# Altium PCB SwitchV2.PcbDoc
Units mil, origin at the board's own origin, x right, y up, seen from the top; angles counter-clockwise.
Board outline 2590 x 2255 mil, 2 copper layers (Top Layer, Bottom Layer); 54 components, 37 nets, 144 pads, 195 vias.
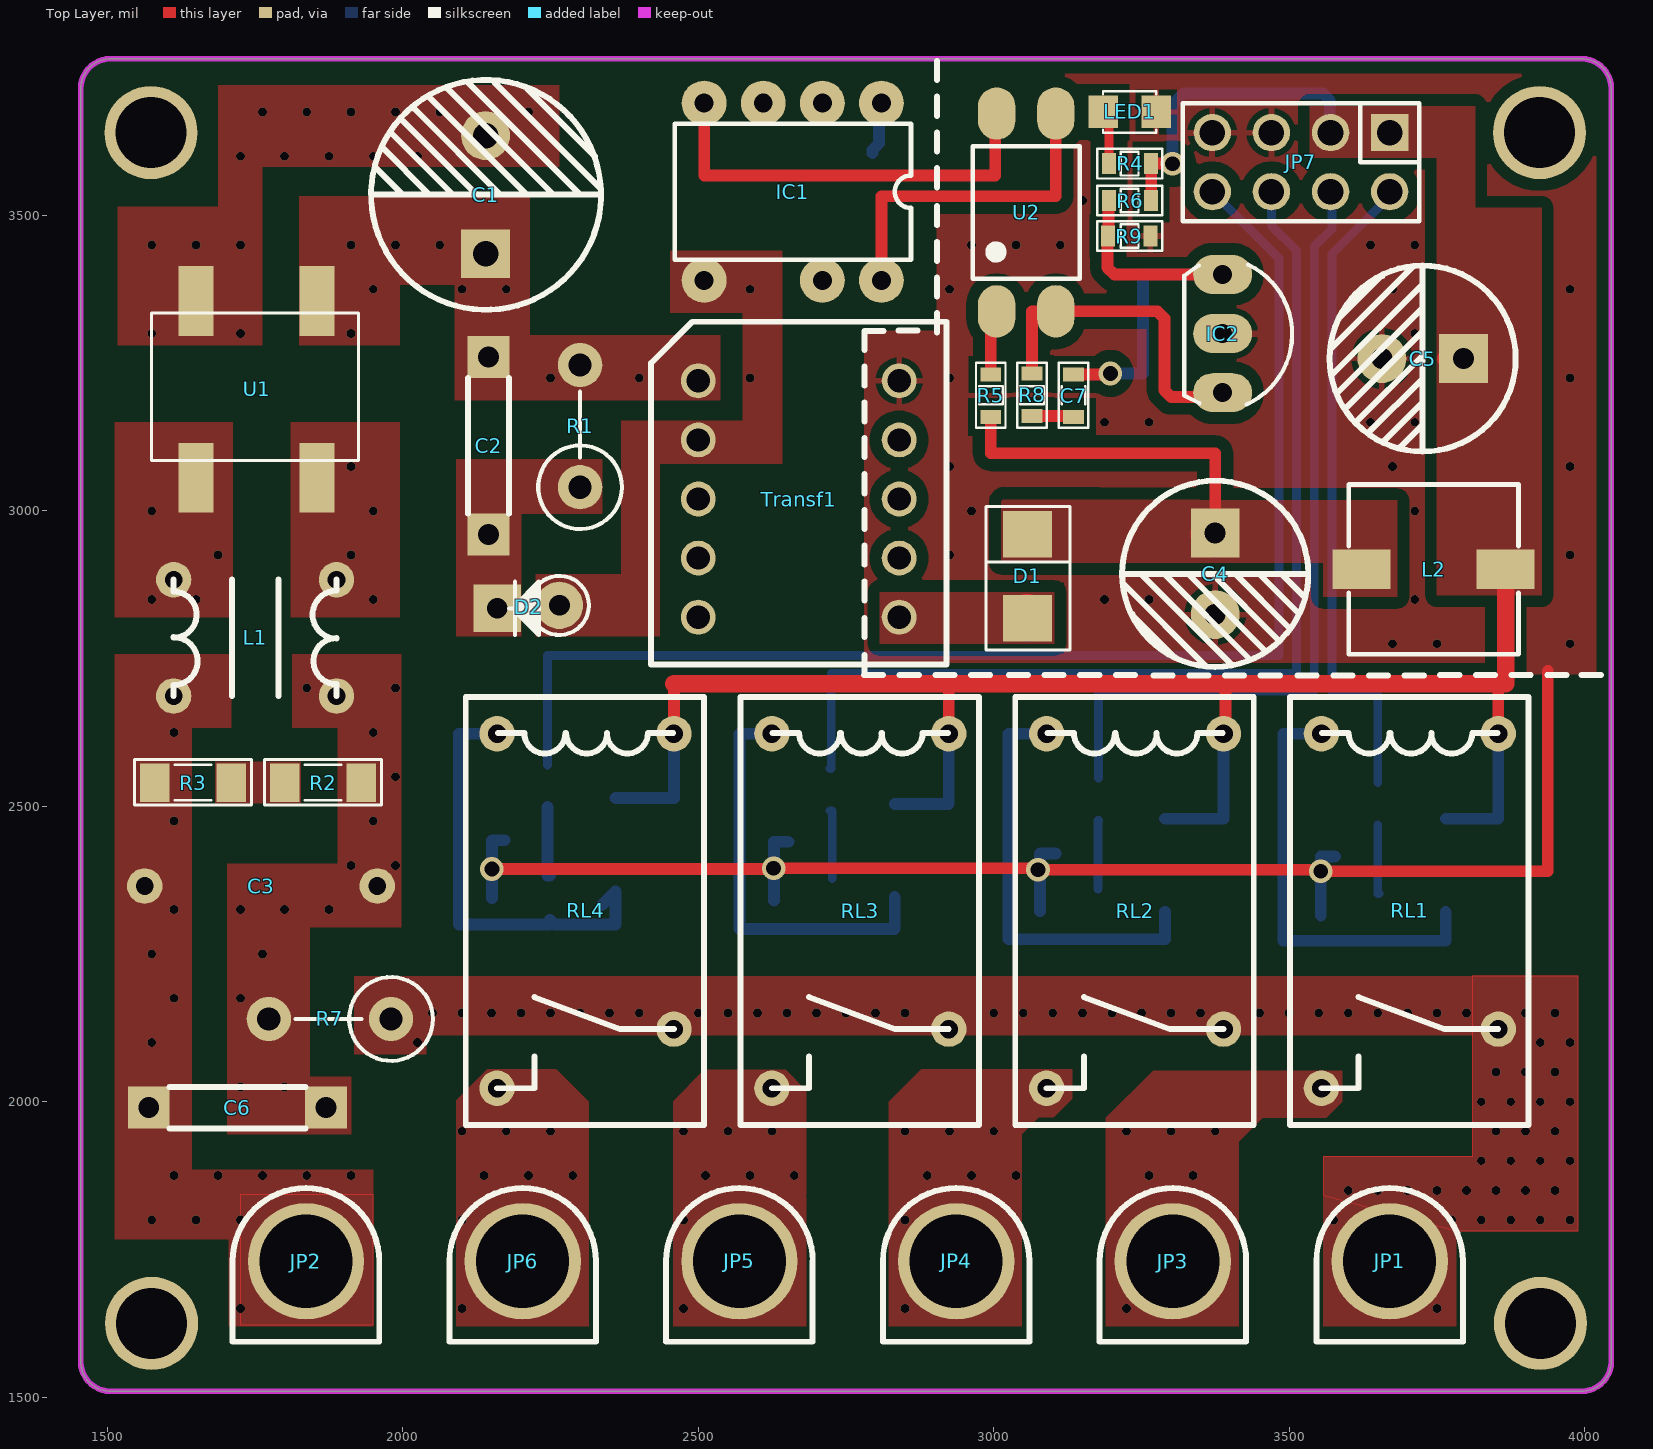
[diagram p0: Top Layer view]
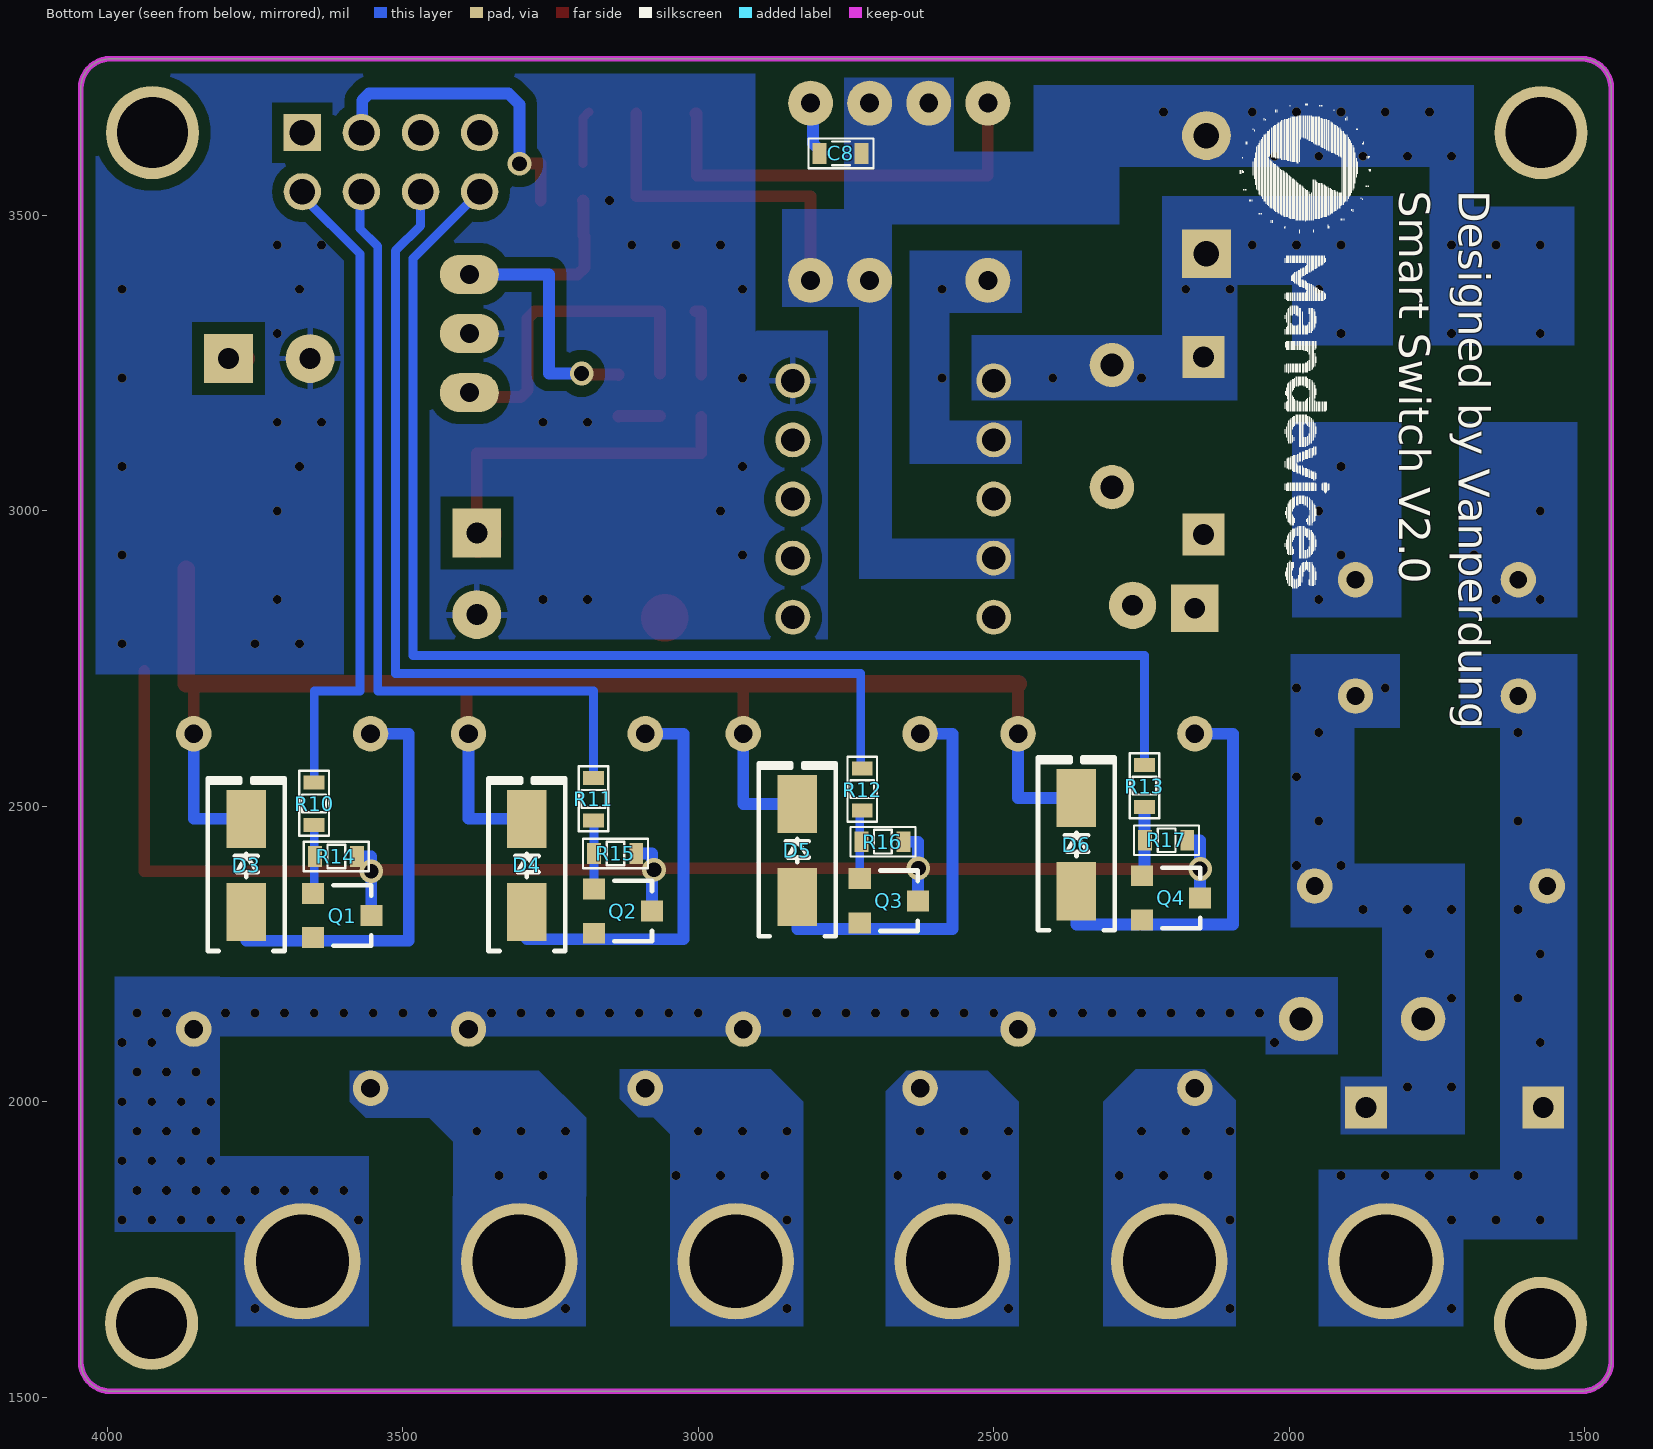
[diagram p1: Bottom Layer view, seen from below]
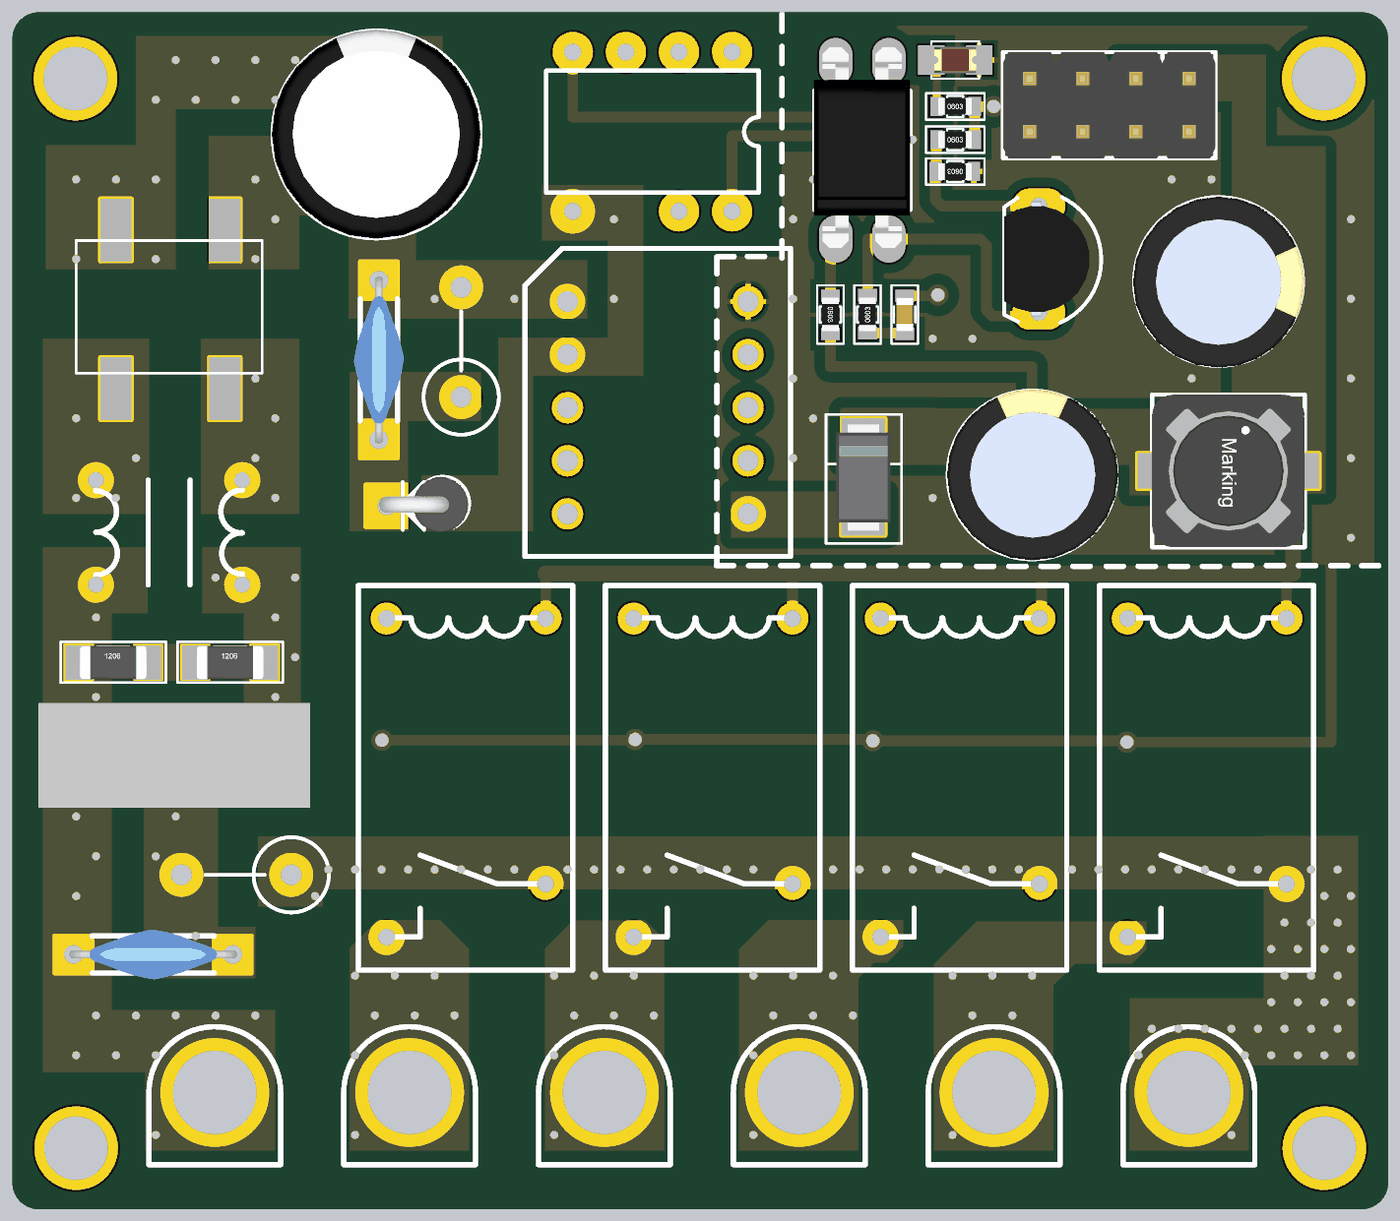
[diagram p2: 3D render of the assembled board from above, using the file's embedded part models]
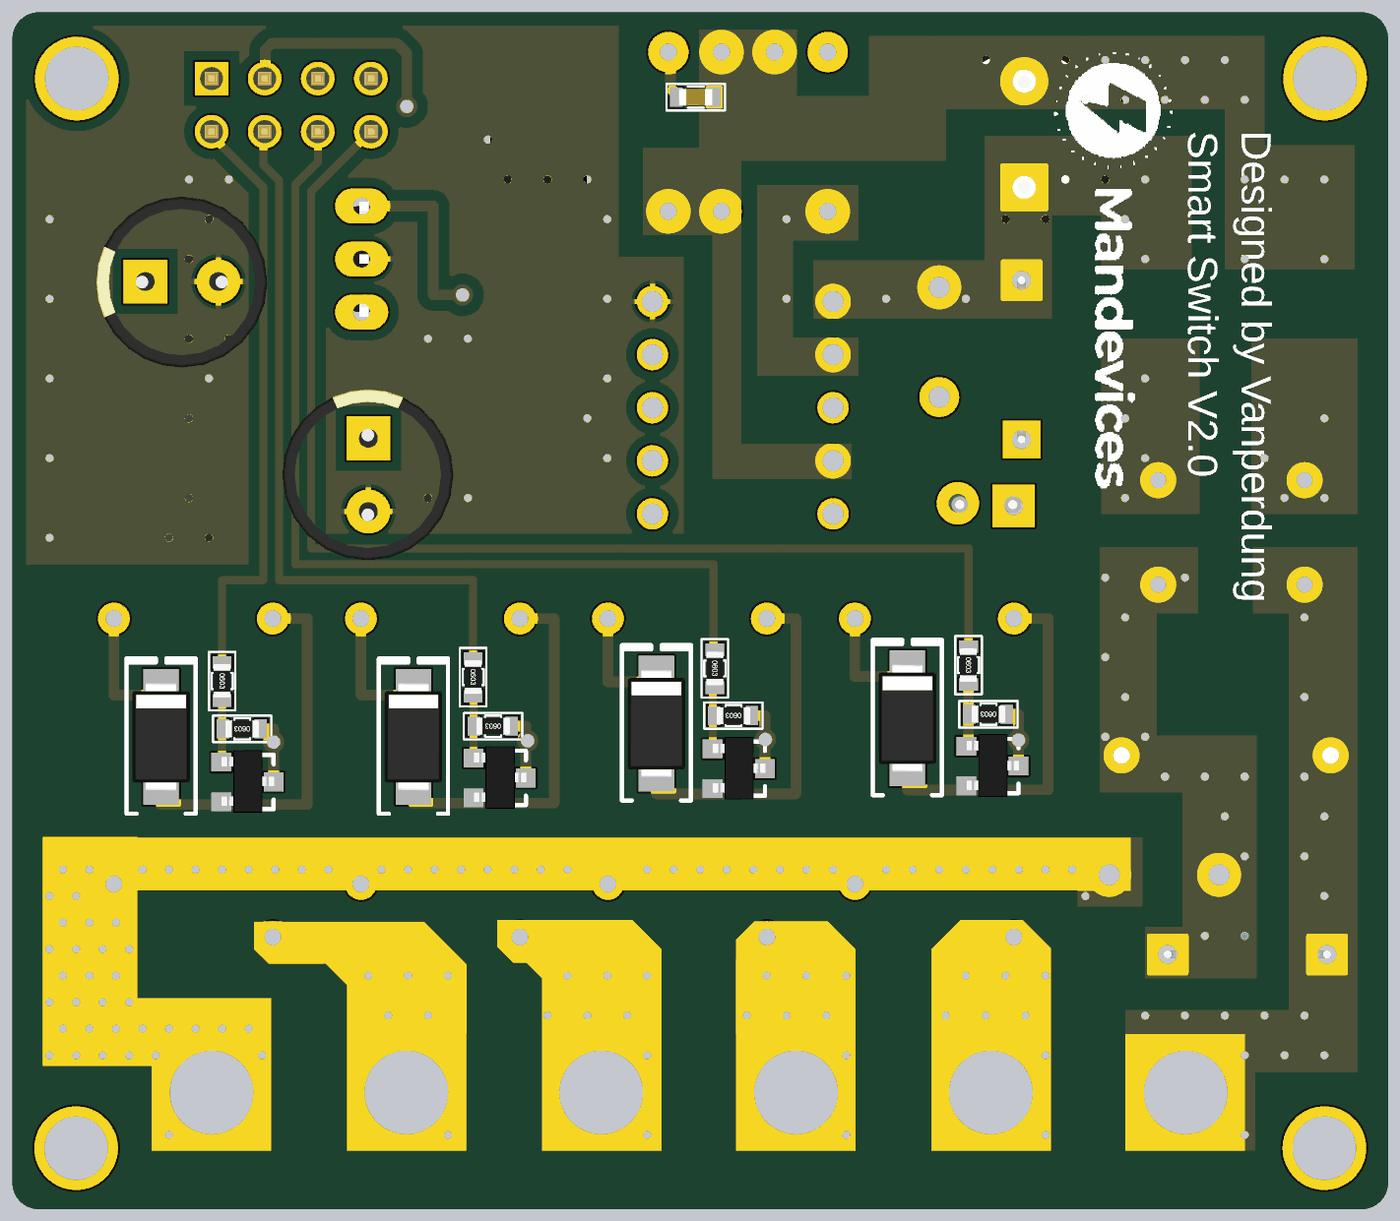
[diagram p3: 3D render of the assembled board from below, using the file's embedded part models]

## Layer stack, top to bottom
Top Solder: solder mask 0.4, Solder Resist, Dk 3.5
Top Layer: signal copper 1.4
Dielectric 1: dielectric 12.6, FR-4, Dk 4.8
Bottom Layer: signal copper 1.4
Bottom Solder: solder mask 0.4, Solder Resist, Dk 3.5

## Board outline
1455,1560 1455,3715 cw(c1505,3715) 1505,3765 3995,3765 cw(c3995,3715) 4045,3715 4045,1560 cw(c3995,1560) 3995,1510 1505,1510 cw(c1505,1560)

## Design rules (kind name [scope] priority, off if disabled: settings)
Clearance Clearance_1 [InNet('GND')] p1: gap=15 ignorepadtopadclearanceinfootprint=FALSE
Clearance [All] p2: gap=15 ignorepadtopadclearanceinfootprint=FALSE
Clearance Clearance_AC [InNetClass('AC')] p3: gap=20 ignorepadtopadclearanceinfootprint=FALSE
PolygonConnect PolygonConnect_AC [InNetClass('AC')] p1: connectstyle=Direct reliefconductorwidth=10 reliefentries=4 polygonreliefangle="90 Angle" airgapwidth=10
PolygonConnect [All] p2: thpad.connectstyle=Relief thpad.reliefconductorwidth=10 thpad.reliefentries=4 thpad.polygonreliefangle="90 Angle" thpad.airgapwidth=10 smdpad.connectstyle=Relief smdpad.reliefconductorwidth=10 smdpad.reliefentries=4 smdpad.polygonreliefangle="90 Angle" smdpad.airgapwidth=10 via.connectstyle=Direct via.reliefconductorwidth=10 via.reliefentries=4 via.polygonreliefangle="90 Angle" via.airgapwidth=10
RoutingVias [All] p1: holewidth=28 width=50 viastyle="Through Hole" minholewidth=10 minwidth=10 maxholewidth=50 maxwidth=50
SolderMaskExpansion [All] p1: expansion=4 istentingtop=FALSE
Width [All] p1: maxlimit=100 minlimit=10 preferedwidth=10
30 further rules are at their usual default settings.

## Classes and differential pairs
net class AC: L_1 L_2 L_3 L_4 L_AC N_AC

## Components (designator, comment, footprint, x,y, rotation, side; value= is the part's Value field where it differs from the comment)
C1 "10uF/400V" C10mm 2137.56,3535.35 r90 top
C2 "1nF/400V" 103/2KV 2145,3260 r270 top
C3 "0.1uF/275v" "Cap AC filter" 1760,2365 r0 top
C4 "680uF/16V" C8mm 3377.5,2900 r270 top
C5 "470uF/16V" C8mm 3732.5,3255 r180 top
C6 "14D471K" 103/2KV 1570,1990 r0 top
C7 "100nF" CAP_0603 3135,3197.5 r270 top value=33p
C8 "100nF" CAP_0603 2756.54,3605 r0 bottom value=33p
D1 "SS14" DO-214AC(SMA) 3060,2867.5 r270 top value=1N5007
D2 "1N4937" DIO-1AN 2210,2835 r0 top value=1N5007
D3 "M7" "DIODE SMA" 3765,2400 r90 bottom
D4 "M7" "DIODE SMA" 3290,2400 r90 bottom
D5 "M7" "DIODE SMA" 2832.5,2425 r90 bottom
D6 "M7" "DIODE SMA" 2360,2435 r90 bottom
IC1 "TNY264" TNY264 2876.54,3736.85 r180 top
IC2 "TL431" qto-92 3387.5,3300 r270 top
JP1 "Coc_dong" Coc_dong 3673.94,1731.65 r0 top
JP2 "Coc_dong" Coc_dong 1840,1731.65 r0 top
JP3 "Coc_dong" Coc_dong 3307.15,1731.65 r0 top
JP4 "Coc_dong" Coc_dong 2940.36,1731.65 r0 top
JP5 "Coc_dong" Coc_dong 2573.57,1731.65 r0 top
JP6 "Coc_dong" Coc_dong 2206.79,1731.65 r0 top
JP7 "JP 2x4 2.54" "JP 2x4 DT" 3520,3590 r180 top
L1 "Inductor EE8.3" "Inductor EE8.3" 1750,2785 r0 top
L2 "22uH" L_SMD 3732.5,2895 r90 top value="150 mH"
LED1 "LED" LED-0805-Red 3185,3675 r0 top value="LED 3 ly Single Colour"
Q1 "2N2222" SOT23 3602.5,2315 r270 bottom value=C9014
Q2 "2N2222" SOT23 3127.5,2322.5 r270 bottom value=C9014
Q3 "2N2222" SOT23 2677.5,2340 r270 bottom value=C9014
Q4 "2N2222" SOT23 2200,2345 r270 bottom value=C9014
R1 "200k/2W" RES-1WW 2300,3105 r90 top
R2 "1M" RES-SMD-1206 1865,2540 r0 top
R3 "1M" RES-SMD-1206 1645,2540 r0 top
R4 "1k" RES-SMD-0603 3230,3587.5 r0 top
R5 "200R" RES-SMD-0603 2995,3195.53 r270 top
R6 "10k" RES-SMD-0603 3230,3525 r0 top
R7 "2R/2W" RES-1WW 1915,2140 r180 top
R8 "3.3k" RES-SMD-0603 3065,3195.54 r90 top
R9 "27k" RES-SMD-0603 3230,3465 r180 top
R10 "1k" RES-SMD-0603 3650,2505 r270 bottom
R11 "1k" RES-SMD-0603 3177.5,2512.5 r270 bottom
R12 "1k" RES-SMD-0603 2722.5,2528.99 r270 bottom
R13 "1k" RES-SMD-0603 2245,2535 r270 bottom
R14 "10k" RES-SMD-0603 3612.5,2415 r0 bottom
R15 "10k" RES-SMD-0603 3140,2420 r0 bottom
R16 "10k" RES-SMD-0603 2687.5,2440 r0 bottom
R17 "10k" RES-SMD-0603 2207.5,2442.5 r0 bottom
RL1 "Relay_HF32" HF32F 3905,2685 r270 top
RL2 "Relay_HF32" HF32F 3440,2685 r270 top
RL3 "Relay_HF32" HF32F 2975,2685 r270 top
RL4 "Relay_HF32" HF32F 2510,2685 r270 top
Transf1 "Transformer EE12.7" "Transformer EE12.7" 2670,3020 r270 top
U1 "Diode Bridge Flate" DB207S 1755,3205 r0 top
U2 "OPTO PC817 SMD" SOP4 3055,3505 r90 top value=PC817

## Footprints (in the part's own frame and the unit in brackets; to place one, negate y for a bottom-side part, rotate by r counter-clockwise, add the part's x,y. Pads: shape width x height; smd on the part's side, far side on the other; paste and mask are expansions set on the pad)
103/2KV [mm]
  rect 1.8x1.8 hole 0.9: 1(0,0) 2(7.62,0)
  silkscreen extent 0.89,-0.89 6.73,0.89, body extent -0.19,-1.2 7.81,1.19, height 9.03
C8mm [mm]
  rect 2.1x2.1 hole 0.9: 1(-1.581,-0.069)
  round 2.1 hole 0.9: 2(1.919,-0.069)
  silkscreen extent -3.83,-4.07 4.17,3.93, body extent -3.93,-4.14 4.27,4.06, height 13.81
C10mm [mm]
  rect 2.1x2.1 hole 1.1: 1(-2.549,-0.062)
  round 2.1 hole 1.1: 2(2.531,-0.062)
  silkscreen extent -4.96,-5.02 4.92,4.85, body extent -5.01,-5.06 4.96,4.94, height 20.01
"Cap AC filter" [mil]
  round 60 hole 30: 1(-196.85,0) 2(196.85,0)
  body extent -256,-98 256,98, height 472
CAP_0603 [mm]
  rect 0.6x0.9 smd: 1(-0.839,0) 2(0.977,0)
  silkscreen extent -1.35,-0.64 1.45,0.64, body extent -0.75,-0.4 0.85,0.4, height 0.9
Coc_dong [mm]
  round 5 hole 4: 1(-0.1,-0.042)
  silkscreen extent -3.25,-3.5 3.05,3.11
DB207S [mm] "Bridge Rectifiers 2A 1000V"
  rect 1.5x3 smd: 1(2.54,3.81) 2(2.54,-3.785) 3(-2.667,-3.785) 4(-2.667,3.81)
  silkscreen extent -4.57,-3.05 4.32,3.3
DIO-1AN [mil] "Diode 1A, W 100mil, L 150mil"
  round 80 hole 35: 1(55,5)
  rect 80x80 hole 35: 2(-50,0)
  silkscreen extent -30,-45 105,55, body extent -64,-50 104,55, height 252
"DIODE SMA" [mm] "SMA"
  rect 2.5x1.7 smd: 1(-2,0) 2(2,0)
  silkscreen extent -3.68,-1.65 3.75,1.65, body extent -2.6,-1.37 2.6,1.37, height 2.4
DO-214AC(SMA) [mm] "DO-214AC Diode Smallest Size"
  rect 2x2.1 smd: 1(1.245,-0.076) 2(-2.367,-0.076)
  silkscreen extent -3.56,-1.86 2.62,1.76, body extent -3.13,-1.38 2.07,1.22, height 2.4
HF32F [mm]
  round 1.524 hole 0.8: 1(16.82,-8.9) 2(14.28,-1.3) 4(1.58,-8.9) 5(1.58,-1.3)
  silkscreen extent 0,-10.25 18.4,0
"Inductor EE8.3" [mil]
  round 60 hole 30: 1(-137.8,-98.43) 2(-137.8,98.43) 3(137.8,-98.43) 4(137.8,98.43)
  silkscreen extent -138,-98 138,98
"JP 2x4 DT" [mm]
  rect 1.61x1.6 hole 1.1: 1(-3.81,-1.27)
  oval 1.61x1.6 hole 1.1: 2(-1.27,-1.27) 3(1.27,-1.27) 4(3.81,-1.27) 5(3.81,1.27) 6(1.27,1.27) 7(-1.27,1.27) 8(-3.81,1.27)
  silkscreen extent -5.08,-2.54 5.08,2.54, body extent -5.08,-2.54 5.08,2.54, height 8.55
L_SMD [mm]
  rect 1.7x2.5 smd: 1(0.15,2.8) 2(0.15,-3.4)
  silkscreen extent -3.5,-3.95 3.8,3.35, body extent -3.5,-3.95 3.8,3.35, height 4.05
LED-0805-Red [mil]
  rect 50x55 smd: 1(0,0) 2(90,0)
  silkscreen extent 0,-35 90,35, body extent 5,-25 85,25, height 43
qto-92 [mil] "TO-92"
  oval 66x100 hole 32: 1(-100,0) 2(0,0) 3(100,0)
  silkscreen extent -117,-65 120,118, body extent -109,-66 109,95, height 245
RES-1WW [mm]
  round 1.905 hole 1: 1(-1.651,0) 2(3.6,0)
  silkscreen extent -3.45,-1.8 2.45,1.8
RES-SMD-0603 [mm]
  rect 0.6x0.9 smd: 1(-0.889,0) 2(0.927,0)
  silkscreen extent -1.4,-0.64 1.4,0.64, body extent -0.8,-0.4 0.8,0.4, height 0.43
RES-SMD-1206 [mil]
  rect 50x65 smd: 1(-65,0) 2(65,0)
  silkscreen extent -99,-38 99,39, body extent -63,-31 63,32, height 40
SOP4 [mm]
  oval 2.25x1.6 smd: 1(-4.25,1.27) 2(-4.25,-1.27) 3(4.25,-1.27) 4(4.25,1.27)
  silkscreen extent -2.85,-2.3 2.85,2.3, body extent -4.67,-2.29 4.93,2.31, height 3.6
SOT23 [mm] "SOT23"
  rect 0.9x0.95 smd: 1(-0.95,-1.25) 2(0,1.25)
  rect 0.9x0.95 smd mask+0: 3(0.95,-1.25)
  silkscreen extent -1.3,-0.38 1.3,1.25, body extent -1.52,-1.23 1.48,1.27, height 1.06
TNY264 [mil] "Opto"
  round 76 hole 32: 1(66.54,46.85) 2(166.54,46.85) 3(266.54,46.85) 4(366.54,46.85) 5(366.54,346.85) 7(166.54,346.85) 8(66.54,346.85)
  silkscreen extent 17,82 417,312
"Transformer EE12.7" [mm]
  round 1.5 hole 1: 1(-5.08,-4.318) 2(-2.54,-4.318) 3(0,-4.318) 4(2.54,-4.318) 5(5.08,-4.318) 6(5.08,4.318) 7(2.54,4.318) 8(0,4.318) 9(-2.54,4.318) 10(-5.08,4.318)
  silkscreen extent -7.62,-6.35 7.11,6.35

## Part data
C1 C4 C5: library part "Cap Pol", "Polarized Capacitor (Axial)", LatestRevisionDate=17-Jul-2002, LatestRevisionNote="Re-released for DXP Platform.", PackageReference=POLAR0.8, Published=8-Jun-2000, Publisher="Altium Limited"
C2: library part Cap2KV, "CAP CERAMIC", LatestRevisionDate=17-Jul-2002, LatestRevisionNote="Re-released for DXP Platform.", PackageReference=RAD-0.3, Published=8-Jun-2000, Publisher="Altium Limited"
C3: library part "Cap AC filter", "Tụ lọc nguồn AC 0.1uf 275v 10mm"
C6: library part Cap2KV, "Capacitor Ceramic 2KV", LatestRevisionDate=17-Jul-2002, LatestRevisionNote="Re-released for DXP Platform.", PackageReference=RAD-0.3, Published=8-Jun-2000, Publisher="Altium Limited"
C7 C8: library part CapSMD, "Capacitor", LatestRevisionDate=17-Jul-2002, LatestRevisionNote="Re-released for DXP Platform.", PackageReference=RAD-0.3, Published=8-Jun-2000, Publisher="Altium Limited"
D1: library part "Diode SMD", "Diode Schottky / 1N5819", Code - JEDEC=DO-214-AB, Published=8-Jun-2000, Publisher="Altium Limited", Revision="July-2002: Re-released for DXP Platform."
D2: library part "Diode SMD", "Diode Schottky / 1N4937", Code - JEDEC=DO-214-AB, Published=8-Jun-2000, Publisher="Altium Limited", Revision="July-2002: Re-released for DXP Platform."
D3 D4 D5 D6: library part "Diode M7 ( 4007 )", "Dán", Chung_Loai=Dán, Don_Vi=Con, Ma_Hang=MH000944, Ten_Linh_Kien="Diode M7 1N4007 SMD 1A 1000V"
IC1: "IC Power"
IC2: "Programmable Shunt Regulator"
JP7: library part "JP 2x4 2.54 Duc Thang", "Cắm", Chung_Loai=Cắm, Don_Vi=Con, Ma_Hang=MH002686, Ten_Linh_Kien="Jump Đôi Đực 2.54MM 2x40P Thẳng 11MM"
L2: library part Inductor, "CD73R 22uH 1.23A 7345"
LED1: "LED Single colour Green and Red"
Q1 Q2 Q3 Q4: library part "C1815 HF SMD", "NPN transistor"
R1 R2 R3 R4 R5 R6 R7 R8 R9 R10 R11 R12 R13 R14 R15 R16 R17: library part "Resistor - SMD", "Resistor", Manufacturer="Generic Components", Class=Passive, Published=08/06/2000, Publisher="Altium Hobart Technology Centre"
Transf1: library part "Tranformer EE16"
U1: "Diode Bridge"
U2: "Single Opto"

## Free pads (board coordinates)
  round 157.48 hole 120: 0(1573.75,3640) 0(1575,1625) 0(3923.75,3640) 0(3925,1625)

## Via types
v1: diameter 15, hole 15, Top Layer to Bottom Layer, tented both sides, 189 vias
v2: diameter 40, hole 25, Top Layer to Bottom Layer, tented both sides, 6 vias

## Nets (pads, with @x,y where several pads share a name; then routed paths per layer and width w, separated by ;. In a path a pad name is that pad's centre, name@x,y a point inside that pad or via, vN(x,y) a via of type N, cw(c..) or ccw(c..) an arc to the next point about the centre after c; other vN are vias at no path point)
+12: C5.1 D3.2 D4.2 D5.2 D6.2 JP7.1 JP7.2 L2.2 R4.2 R6.2 RL1.5 RL2.5 RL3.5 RL4.5 | length 3399.6
  Top Layer w20: RL4.5 2458.82,2707.5 ; 2922.5,2707.5 2923.82,2707.5 RL3.5 ; R6.2 R4.2 v2(3302.5,3587.5) ; RL2.5 3392.5,2622.8 3392.5,2707.5 ; RL1.5 3853.82,2707.5
  Top Layer w30: 2458.82,2707.5 2922.5,2707.5 ; 2923.82,2707.5 3392.5,2707.5 3866.36,2707.5 L2.2 ; C5.1@3765,3257.7 C5.1
  Bottom Layer w20: D6.2 2458.82,2513.74 RL4.5 ; D5.2 2923.82,2503.74 RL3.5 ; D4.2 3388.82,2478.74 RL2.5 ; v2(3302.5,3587.5) 3302.5,3687.5 3321.25,3706.25 3557.03,3706.25 3568.75,3694.53 3568.75,3641.25 JP7.2 ; D3.2 3853.82,2478.74 RL1.5
GND: C4.2 C5.2 IC2.2 JP7.3 JP7.4 LED1.2 Q1.2 Q2.2 Q3.2 Q4.2 R9.1 R14.1 R15.1 R16.1 R17.1 Transf1.10 | length 2620.3
  Top Layer w20: v2(2150.79,2393.75) 2627.5,2393.75 v2(2627.5,2395) 3075,2395 v2(3075,2392.5) v2@3552.5,2392.5 ; v2(3553.29,2390) 3937.5,2390 3937.5,2728.75
  Bottom Layer w20: Q4.2 v2(2150.79,2393.75) 2150.79,2442.5 R17.1 ; Q3.2 2628.29,2440 R16.1 ; Q2.2 3078.29,2420 R15.1 ; Q1.2 v2(3553.29,2390) 3553.29,2415 R14.1
  other v1: 3675,2775 3750,2775 3975,2775 3187.5,2850 3262.5,2850 3712.5,2850 2925,2925 3975,2925 2962.5,3000 3712.5,3000 2925,3075 3675,3075 3975,3075 3187.5,3150 3262.5,3150 3637.5,3150 3712.5,3150 2925,3225 3975,3225 3712.5,3300 2925,3375 3675,3375 3975,3375 2962.5,3450 3037.5,3450 3112.5,3450 3637.5,3450 3712.5,3450 3150,3525
GND_AC: C1.2 C8.1 IC1.2 IC1.3 IC1.7 IC1.8 Transf1.4 U1.4 U2.3 | length 577.3
  Top Layer w20: IC1.8 2810,3532.5 3105,3532.5 U2.3
  other v1: 1575,3300 1725,3300 1575,3450 1650,3450 1725,3450 1725,3600 1800,3600 1875,3600 1950,3600 2025,3600 1762.5,3675 1837.5,3675 1912.5,3675 1987.5,3675 2062.5,3675 2212.5,3675
L_1: JP3.1 RL1.1
  other v1: 3225,1650 3262.5,1875 3337.5,1875 3225,1950 3300,1950 3375,1950
L_2: JP4.1 RL2.1
  other v1: 2850,1650 2850,1800 2887.5,1875 2962.5,1875 3037.5,1875 2850,1950 2925,1950 3000,1950
L_3: JP5.1 RL3.1
  other v1: 2475,1650 2475,1800 2512.5,1875 2587.5,1875 2662.5,1875 2475,1950 2550,1950 2625,1950
L_4: JP6.1 RL4.1
  other v1: 2100,1650 2100,1800 2137.5,1875 2212.5,1875 2287.5,1875 2100,1950 2175,1950 2250,1950
L_AC: JP1.1 R7.1 RL1.2 RL2.2 RL3.2 RL4.2
  other v1: 3750,1650 3575,1800 3775,1800 3825,1800 3875,1800 3925,1800 3975,1800 3600,1850 3650,1850 3700,1850 3750,1850 3800,1850 3850,1850 3900,1850 3950,1850 3825,1900 3875,1900 3925,1900 3975,1900 3850,1950 3900,1950 3950,1950 3825,2000 3875,2000 3925,2000 3975,2000 3850,2050 3900,2050 3950,2050 2025,2100 3925,2100 3975,2100 2050,2150 2100,2150 2150,2150 2200,2150 2250,2150 2300,2150 2350,2150 2400,2150 2500,2150 2550,2150 2600,2150 2650,2150 2700,2150 2750,2150 2800,2150 2850,2150 3000,2150 3050,2150 3100,2150 3150,2150 3200,2150 3250,2150 3300,2150 3350,2150 3450,2150 3500,2150 3550,2150 3600,2150 3650,2150 3700,2150 3750,2150 3800,2150 3900,2150 3950,2150
N_AC: C3.1 C6.1 JP2.1 L1.1 R3.1
  other v1: 1725,1650 1575,1800 1650,1800 1725,1800 1612.5,1875 1687.5,1875 1762.5,1875 1837.5,1875 1912.5,1875 1575,2100 1612.5,2175 1575,2250 1612.5,2325 1612.5,2475 1612.5,2625
NetC1_1: C1.1 C2.1 R1.2 Transf1.1 U1.1
  other v1: 2250,3225 2400,3225 1912.5,3300 1950,3375 2100,3375 2175,3375 1912.5,3450 1987.5,3450 2062.5,3450
NetC2_2: C2.2 D2.2 R1.1
NetC3_2: C3.2 C6.2 L1.3 R2.2 R7.2
  other v1: 1725,2025 1800,2025 1725,2175 1762.5,2250 1725,2325 1800,2325 1875,2325 1912.5,2400 1987.5,2400 1950,2475 1987.5,2550 1950,2625 1837.5,2700 1987.5,2700
NetC4_1: C4.1 D1.2 L2.1 R5.2 | length 578.8
  Top Layer w20: R5.2 2995,3097.5 3374.8,3097.5 C4.1
  Top Layer w80: C4.1@3373.25,2960.7 C4.1
NetC7_1: C7.1 IC2.1 R6.1 R9.2 | length 736.7
  Top Layer w20: C7.1@3135,3230 C7.1 3197.5,3230.53 v2(3197.5,3232.5) ; R6.1 3194.25,3524.26 3194.25,3465.74 R9.2 3192.5,3463.98 3192.5,3411.72 3204.22,3400 IC2.1
  Bottom Layer w20: v2(3197.5,3232.5) 3252.5,3232.5 3252.5,3400 IC2.1
NetC7_2: C7.2 R8.1 | length 71.5
  Top Layer w20: R8.1 3135,3160.53 C7.2
NetC8_2: C8.2 IC1.1 | length 91.2
  Bottom Layer w20: C8.2 2795,3610.91 2806.09,3622 2806.09,3686.09 IC1.1
NetD1_1: D1.1 Transf1.6 | length 0.9
  Top Layer w80: D1.1@3056.37,2819.13 D1.1
NetD2_1: D2.1 IC1.5 Transf1.2
  other v1: 2587.5,3225 2587.5,3375
NetD3_1: D3.1 Q1.3 RL1.4 | length 738.8
  Bottom Layer w20: RL1.4 3490,2622.8 3490,2272.5 3524.01,2272.5 3524.23,2272.28 3582.34,2272.28 3582.56,2272.5 3765,2272.5 D3.1
NetD4_1: D4.1 Q2.3 RL2.4 | length 723.7
  Bottom Layer w20: RL2.4 3025,2622.8 3025,2275 3290,2275 D4.1
NetD5_1: D5.1 Q3.3 RL3.4 | length 701.2
  Bottom Layer w20: RL3.4 2570,2622.8 2570,2292.5 2832.5,2292.5 D5.1
NetD6_1: D6.1 Q4.3 RL4.4 | length 760
  Top Layer w20: RL4.4 RL4.4@2159.61,2630
  Bottom Layer w20: RL4.4 2095,2622.8 2095,2300 2249.21,2300 Q4.3 2256.93,2299.88 2360,2299.88 D6.1 D6.1@2336.54,2332.8
NetIC1_4: IC1.4 U2.4 | length 722.3
  Top Layer w20: IC1.4 2510,3567.5 3002.5,3567.5 3002.5,3672.32 U2.4
NetIC2_3: IC2.3 R8.2 U2.2 | length 562.7
  Top Layer w20: R8.2 3065,3337.68 U2.2 3277.03,3337.68 3288.75,3325.96 3288.75,3204.22 3300.47,3192.5 3380,3192.5 IC2.3
NetL1_2: L1.2 U1.3
  other v1: 1575,2850 1650,2850 1687.5,2925 1575,3000
NetL1_4: L1.4 U1.2
  other v1: 1950,2850 1912.5,2925 1950,3000 1912.5,3075
NetLED1_1: LED1.1 R4.1 | length 91.6
  Top Layer w15: LED1.1 3195,3665 R4.1
NetQ1_1: Q1.1 R10.2 R14.2 | length 117.8
  Bottom Layer w15: R10.2 3650,2410 3650,2352.4 Q1.1
NetQ2_1: Q2.1 R11.2 R15.2 | length 116.9
  Bottom Layer w15: Q2.1 3176.71,2476.01 R11.2
NetQ3_1: Q3.1 R12.2 R16.2 | length 119.3
  Bottom Layer w15: R12.2 2726.71,2492.5 2726.71,2440 Q3.1
NetQ4_1: Q4.1 R13.2 R17.2 | length 120.3
  Bottom Layer w20: R13.2 2245,2442.5 2245,2382.4 Q4.1
NetR2_1: R2.1 R3.2
NetR5_1: R5.1 U2.1 | length 117.1
  Top Layer w20: R5.1 2995,3337.68 U2.1
RL1: JP7.8 R10.1 | length 1117.9
  Bottom Layer w15: R10.1 3650,2695 3572.5,2695 3572.5,3435.07 3670,3532.57 JP7.8
RL2: JP7.7 R11.1 | length 1371
  Bottom Layer w15: R11.1 3177.5,2695 3542.5,2695 3542.5,3447.5 3572.5,3477.5 3572.5,3537.5 JP7.7
RL3: JP7.6 R12.1 | length 1786.1
  Bottom Layer w15: R12.1 2725,2563.99 2725,2725 3512.5,2725 3512.5,3440 3470,3482.5 JP7.6 JP7.6@3467.5,3540
RL4: JP7.5 R13.1 | length 2254.1
  Bottom Layer w15: R13.1 2245,2755 3482.5,2755 3482.5,3427.5 JP7.5
pads on no net: Transf1.3 Transf1.5 Transf1.7 Transf1.8 Transf1.9

## Polygon pours and split planes (outlines as drawn)
GND on Top Layer "100" (solid, pour order 92): 2903.75,3761.25 2903.75,3302.08 2901.25,3304.58 2781.25,3304.58 2781.25,2723.75 4045,2723.75 4045,3715 ccw(c3995,3715) 3995,3765
no net on Top Layer "100" (solid, pour order 87): 3558.38,1840.66 3558.38,1908.12 3810.62,1908.12 3810.62,2213.12 3988.35,2213.12 3988.35,1780.62 3783.12,1780.62
L_AC on Top Layer "100" (solid, pour order 86): 3558.38,1840.66 3558.38,1908.12 3810.62,1908.12 3810.62,2213.12 3988.35,2213.12 3988.35,1780.62 3783.12,1780.62
L_AC on Top Layer "100" (solid, pour order 78): 1917.5,2112.5 1917.5,2080 2040,2080 2040,2112.5
+12 on Top Layer "100" (solid, pour order 77): 3927.5,3307.5 3927.5,3512.5 3815,3512.5 3815,3685 3715,3685 3715,3597.5 3750,3597.5 3750,3307.5
+12 on Top Layer "100" (solid, pour order 76): 3535,3685 3535,3597.5 3715,3597.5 3715,3685
+12 on Top Layer "100" (solid, pour order 75): 3750,3307.5 3750,3205 3750,2857.5 3927.5,2857.5 3927.5,3307.5
NetC4_1 on Top Layer "100" (solid, pour order 74): 3012.5,3020 3012.5,2912.5 3557.5,2912.5 3557.5,2855 3682.5,2855 3682.5,3017.5
NetD1_1 on Top Layer "100" (solid, pour order 73): 3102.5,2862.5 3102.5,2775 2807.5,2775 2807.5,2862.5
N_AC on Top Layer "100" (solid, pour order 71): 1950,1840 1950,1885 1642.5,1885 1642.5,2757.5 1512.5,2757.5 1512.5,1767.5 1705,1767.5 1705,1620 1725,1620
no net on Top Layer "100" (solid, pour order 70): 1725,1842.5 1725,1622.5 1950,1622.5 1950,1842.5
NetL1_2 on Top Layer "100" (solid, pour order 50): 1512.5,2820 1712.5,2820 1712.5,3150 1512.5,3150
NetD2_1 on Top Layer "100" (solid, pour order 59): 2537.5,3152.5 2575,3152.5 2575,3335 2452.5,3335 2452.5,3440 2642.5,3440 2642.5,3080 2537.5,3080
NetD2_1 on Top Layer "100" (solid, pour order 58): 2225,2787.5 2435,2787.5 2435,3080 2537.5,3080 2537.5,3152.5 2370,3152.5 2370,2892.5 2225,2892.5
NetC2_2 on Top Layer "100" (solid, pour order 56): 2337.5,3087.5 2090,3087.5 2090,2787.5 2200,2787.5 2200,2995 2337.5,2995
NetC1_1 on Top Layer "100" (solid, pour order 55): 2537.5,3187.5 2087.5,3187.5 2087.5,3297.5 2537.5,3297.5
GND_AC on Top Layer "100" (solid, pour order 53): 1712.5,3280 1517.5,3280 1517.5,3515 1687.5,3515 1687.5,3720 2265,3720 2265,3582.5 1762.5,3582.5 1762.5,3280
NetC1_1 on Top Layer "100" (solid, pour order 52): 1825,3280 1995,3280 1995,3382.5 2087.5,3382.5 2087.5,3212.5 2215,3212.5 2215,3532.5 1825,3532.5
NetL1_4 on Top Layer "100" (solid, pour order 51): 1810,3150 1995,3150 1995,2820 1810,2820
N_AC on Top Layer "100" (solid, pour order 49): 1577.5,2632.5 1710,2632.5 1710,2757.5 1577.5,2757.5
NetC3_2 on Top Layer "100" (solid, pour order 48): 1812.5,2757.5 1997.5,2757.5 1997.5,2402.5 1890,2402.5 1890,2632.5 1812.5,2632.5
NetR2_1 on Top Layer "100" (solid, pour order 46): 1682.5,2575 1682.5,2505 1827.5,2505 1827.5,2575
NetC3_2 on Top Layer "100" (solid, pour order 45): 1702.5,2212.5 1702.5,2402.5 1997.5,2402.5 1997.5,2295 1842.5,2295 1842.5,2212.5
NetC3_2 on Top Layer "100" (solid, pour order 44): 1702.5,2212.5 1702.5,1945 1912.5,1945 1912.5,2042.5 1842.5,2042.5 1842.5,2212.5
L_1 on Top Layer "100" (solid, pour order 41): 3190,1840 3190,1972.5 3270,2052.5 3590,2052.5 3590,2000 3562.5,1972.5 3455,1972.5 3415,1932.5 3415,1840
L_2 on Top Layer "100" (solid, pour order 39): 2822.76,1840.04 2822.76,2000.26 2877.5,2055 3132.5,2055 3132.5,2005 3101.49,1973.99 3076.49,1973.99 3047.76,1945.26 3047.76,1840.04
L_3 on Top Layer "100" (solid, pour order 37): 2683.02,1838.75 2682.76,2018.71 2647.76,2053.71 2510.26,2053.71 2457.76,2001.21 2458.02,1838.75
L_4 on Top Layer "100" (solid, pour order 36): 2090,1840 2090,2002.5 2142.5,2055 2260,2055 2315,2000 2315,1840
L_AC on Top Layer "100" (solid, pour order 17): 3887.5,2112.5 1917.5,2112.5 1917.5,2212.5 3887.5,2212.5
L_AC on Top Layer "100" (solid, pour order 13): 3557.76,1840.04 3557.76,1620.04 3782.76,1620.04 3782.76,1840.04
L_1 on Top Layer "100" (solid, pour order 11): 3190,1840 3190,1620 3415,1620 3415,1840
L_2 on Top Layer "100" (solid, pour order 9): 2822.76,1840.04 2822.76,1620.04 3047.76,1620.04 3047.76,1840.04
L_3 on Top Layer "100" (solid, pour order 7): 2457.76,1840.04 2457.76,1620.04 2682.76,1620.04 2682.76,1840.04
L_4 on Top Layer "100" (solid, pour order 5): 2090,1840 2090,1620 2315,1620 2315,1840
N_AC on Top Layer "100" (solid, pour order 1): 1725,1840 1725,1620 1950,1620 1950,1840
L_AC on Bottom Solder "100" (solid, pour order 88): 3557.76,1840.04 3557.76,1907.5 3810,1907.5 3810,2212.5 3987.73,2212.5 3987.73,1780 3782.5,1780
L_1 on Bottom Solder "100" (solid, pour order 85): 3190.11,1838.87 3190.11,1971.37 3270.11,2051.37 3590.11,2051.37 3590.11,1998.87 3562.61,1971.37 3455.11,1971.37 3415.11,1931.37 3415.11,1838.87
L_2 on Bottom Solder "100" (solid, pour order 83): 2822.76,1840.04 2822.76,2000.26 2877.5,2055 3132.5,2055 3132.5,2005 3101.49,1973.99 3076.49,1973.99 3047.76,1945.26 3047.76,1840.04
L_3 on Bottom Solder "100" (solid, pour order 82): 2683.02,1837.5 2682.76,2017.46 2647.76,2052.46 2510.26,2052.46 2457.76,1999.96 2458.02,1837.5
L_4 on Bottom Solder "100" (solid, pour order 35): 2090,1840 2090,2002.5 2142.5,2055 2260,2055 2315,2000 2315,1840
L_AC on Bottom Solder "100" (solid, pour order 15): 3887.5,2110 1940,2110 1940,2210 3887.5,2210
L_AC on Bottom Solder "100" (solid): 3557.76,1840.04 3557.76,1620.04 3782.76,1620.04 3782.76,1840.04
L_1 on Bottom Solder "100" (solid): 3190.26,1840.04 3190.26,1620.04 3415.26,1620.04 3415.26,1840.04
L_2 on Bottom Solder "100" (solid): 2822.76,1840.04 2822.76,1620.04 3047.76,1620.04 3047.76,1840.04
L_3 on Bottom Solder "100" (solid): 2457.76,1840.04 2457.76,1620.04 2682.76,1620.04 2682.76,1840.04
L_4 on Bottom Solder "100" (solid, pour order 3): 2090,1840 2090,1620 2315,1620 2315,1840
N_AC on Bottom Solder "100" (solid, pour order 0): 1725,1840 1725,1620 1950,1620 1950,1840
GND on Bottom Layer "100" (solid, pour order 94): 2903.75,3761.25 2903.75,3302.08 2901.25,3304.58 2781.25,3304.58 2781.25,2723.75 4045,2723.75 4045,3715 ccw(c3995,3715) 3995,3765
NetC3_2 on Bottom Layer "100" (solid, pour order 91): 1702.5,2212.5 1702.5,1945 1912.5,1945 1912.5,2042.5 1842.5,2042.5 1842.5,2212.5
NetC3_2 on Bottom Layer "100" (solid, pour order 90): 1702.5,2212.5 1702.5,2402.5 1997.5,2402.5 1997.5,2295 1842.5,2295 1842.5,2212.5
NetC3_2 on Bottom Layer "100" (solid, pour order 89): 1812.5,2757.5 1997.5,2757.5 1997.5,2402.5 1890,2402.5 1890,2632.5 1812.5,2632.5
L_AC on Bottom Layer "100" (solid, pour order 19): 3557.76,1840.04 3557.76,1907.5 3810,1907.5 3810,2211.25 3987.73,2211.25 3987.73,1780 3782.5,1780
L_3 on Bottom Layer "100" (solid, pour order 34): 2683.02,1837.5 2682.76,2017.46 2647.76,2052.46 2510.26,2052.46 2457.76,1999.96 2458.02,1837.5
L_4 on Bottom Layer "100" (solid, pour order 79): 2090,1840 2090,2002.5 2142.5,2055 2260,2055 2315,2000 2315,1840
L_AC on Bottom Layer "100" (solid, pour order 43): 1917.5,2112.5 1917.5,2080 2040,2080 2040,2112.5
N_AC on Bottom Layer "100" (solid, pour order 72): 1642.5,2757.5 1642.5,2632.5 1710,2632.5 1710,2757.5
N_AC on Bottom Layer "100" (solid, pour order 42): 1950,1840 1950,1885 1642.5,1885 1642.5,2757.5 1512.5,2757.5 1512.5,1767.5 1705,1767.5 1705,1620 1725,1620
NetL1_4 on Bottom Layer "100" (solid, pour order 69): 1810,3150 1995,3150 1995,2820 1810,2820
NetD2_1 on Bottom Layer "100" (solid, pour order 67): 2452.5,3152.5 2575,3152.5 2575,3335 2452.5,3335 2452.5,3440 2642.5,3440 2642.5,3080 2452.5,3080
GND_AC on Bottom Layer "100" (solid, pour order 66): 2672.71,3355.17 2672.5,2952.5 2465,2952.5 2465,2885 2727.5,2885 2727.5,3354.83
GND_AC on Bottom Layer "100" (solid, pour order 65): 2265,3720 2432.5,3720 2432.5,3607.5 2692.5,3607.5 2692.5,3485 2287.5,3485 2287.5,3582.5 2265,3582.5
GND_AC on Bottom Layer "100" (solid, pour order 64): 2567.7,3732.85 2752.7,3732.85 2752.7,3510.35 2857.7,3510.35 2857.7,3345.35 2672.7,3345.35 2672.7,3570.35 2567.7,3570.35
NetC1_1 on Bottom Layer "100" (solid, pour order 62): 2537.5,3187.5 2087.5,3187.5 2087.5,3297.5 2537.5,3297.5
NetC1_1 on Bottom Layer "100" (solid, pour order 61): 1825,3280 1995,3280 1995,3382.5 2087.5,3382.5 2087.5,3212.5 2215,3212.5 2215,3532.5 1825,3532.5
NetL1_2 on Bottom Layer "100" (solid, pour order 60): 1512.5,2820 1712.5,2820 1712.5,3150 1512.5,3150
GND_AC on Bottom Layer "100" (solid, pour order 54): 1712.5,3280 1517.5,3280 1517.5,3515 1687.5,3515 1687.5,3720 2265,3720 2265,3582.5 1762.5,3582.5 1762.5,3280
L_1 on Bottom Layer "100" (solid, pour order 31): 3190,1840 3190,1972.5 3270,2052.5 3590,2052.5 3590,2000 3562.5,1972.5 3455,1972.5 3415,1932.5 3415,1840
L_2 on Bottom Layer "100" (solid, pour order 32): 2822.76,1840.04 2822.76,2000.26 2877.5,2055 3132.5,2055 3132.5,2005 3101.49,1973.99 3076.49,1973.99 3047.76,1945.26 3047.76,1840.04
L_AC on Bottom Layer "100" (solid, pour order 16): 3887.03,2110.79 1917.5,2110.79 1917.5,2210.79 3887.03,2210.79
L_AC on Bottom Layer "100" (solid, pour order 12): 3557.76,1840.04 3557.76,1620.04 3782.76,1620.04 3782.76,1840.04
L_1 on Bottom Layer "100" (solid, pour order 10): 3190.26,1840.04 3190.26,1620.04 3415.26,1620.04 3415.26,1840.04
L_2 on Bottom Layer "100" (solid, pour order 8): 2822.76,1840.04 2822.76,1620.04 3047.76,1620.04 3047.76,1840.04
L_3 on Bottom Layer "100" (solid, pour order 6): 2457.76,1840.04 2457.76,1620.04 2682.76,1620.04 2682.76,1840.04
L_4 on Bottom Layer "100" (solid, pour order 4): 2090,1840 2090,1620 2315,1620 2315,1840
N_AC on Bottom Layer "100" (solid, pour order 2): 1725,1840 1725,1620 1950,1620 1950,1840

## Keep-outs
Keep-Out Layer:
  lines w10: 1455,1560 ccw(c1505,1560) 1505,1510 3995,1510 ccw(c3995,1560) 4045,1560 4045,3715 ccw(c3995,3715) 3995,3765 1775,3765 1505,3765 ccw(c1505,3715) 1455,3715 1455,1560

## Silkscreen, mask and mechanical layers (free items; w line width, h text height)
Top Overlay:
  lines w10: 2780.42,2722.5 2812.92,2722.5 ; 2781.25,2723.75 2781.25,2756.25 ; 2781.25,2786.25 2781.25,2818.75 ; 2781.25,2848.33 2781.25,2880.83 ; 2781.25,2908.75 2781.25,2941.25 ; 2781.25,2969.17 2781.25,3001.67 ; 2781.25,3029.58 2781.25,3062.08 ; 2781.25,3090.83 2781.25,3123.33 ; 2781.25,3151.25 2781.25,3183.75 ; 2781.25,3211.67 2781.25,3244.17 ; 2781.25,3272.08 2781.25,3304.58 2813.75,3304.58 ; 2838.75,3305 2871.25,3305 ; 2840.83,2722.5 2873.33,2722.5 ; 2901.25,2722.5 2933.75,2722.5 ; 2903.75,3302.08 2903.75,3334.58 ; 2903.75,3362.5 2903.75,3395 ; 2903.75,3422.92 2903.75,3455.42 ; 2903.75,3483.33 2903.75,3515.83 ; 2903.75,3547.5 2903.75,3580 ; 2903.75,3607.92 2903.75,3640.42 ; 2903.75,3668.33 2903.75,3700.83 ; 2903.75,3728.75 2903.75,3761.25 ; 2961.67,2722.5 2994.17,2722.5 ; 3025.42,2722.5 3057.92,2722.5 ; 3085.83,2722.5 3118.33,2722.5 ; 3146.25,2722.5 3178.75,2722.5 ; 3206.67,2722.5 3239.17,2722.5 ; 3270.42,2721.25 3302.92,2721.25 ; 3330.83,2721.25 3363.33,2721.25 ; 3391.25,2721.25 3423.75,2721.25 ; 3451.67,2721.25 3484.17,2721.25 ; 3514.17,2721.25 3546.67,2721.25 ; 3574.58,2721.25 3607.08,2721.25 ; 3635,2721.25 3667.5,2721.25 ; 3695.42,2721.25 3727.92,2721.25 ; 3755.42,2722.5 3787.92,2722.5 ; 3815.83,2722.5 3848.33,2722.5 ; 3876.25,2722.5 3908.75,2722.5 ; 3936.67,2722.5 3969.17,2722.5 ; 3995,2722.5 4027.5,2722.5
Bottom Overlay:
  drawing of 653 lines, arcs and shapes, not listed
  text "Designed by Vanperdung" at 1730.59,3542.5 h90 r90
  text "Smart Switch V2.0" at 1831.5,3541.25 h90 r90